# Altium PCB DSS0012A.PcbDoc
Units mm, origin at the board's own origin, x right, y up, seen from the top; angles counter-clockwise.
Board outline 10.92 x 16.13 mm, 2 copper layers (Top Layer, Bottom Layer); 3 components, 13 nets, 25 pads, 0 vias.
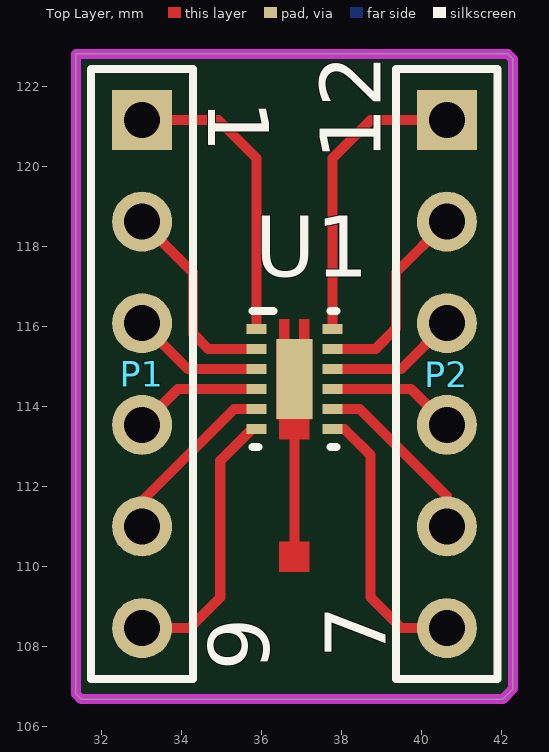
[diagram p0: Top Layer view]
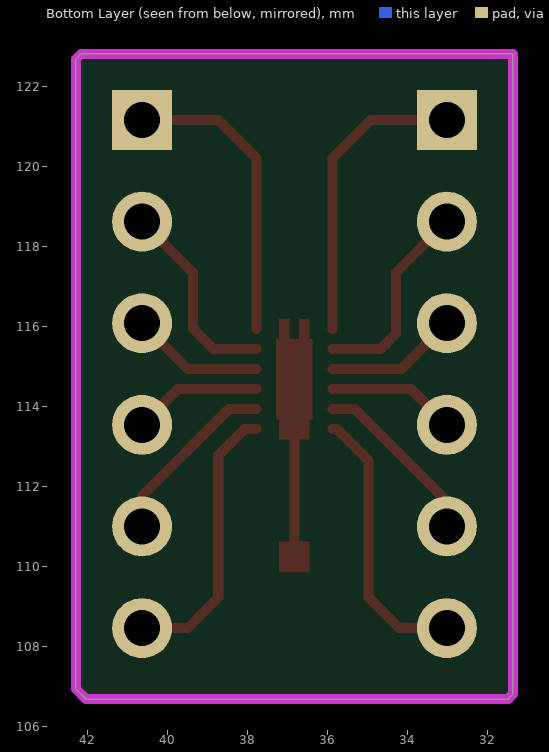
[diagram p1: Bottom Layer view, seen from below]

## Layer stack, top to bottom
Top Solder: solder mask 0.0102, Solder Resist, Dk 3.5
Top Layer: signal copper 0.0356
Dielectric 1: dielectric 0.32, FR-4, Dk 4.8
Bottom Layer: signal copper 0.0356
Bottom Solder: solder mask 0.0102, Solder Resist, Dk 3.5

## Board outline
31.496,106.68 31.369,106.807 31.369,122.809 42.164,122.809 42.291,122.682 42.291,106.934 42.037,106.68

## Design rules (kind name [scope] priority, off if disabled: settings)
Clearance [All] p1 off: gap=0.254 ignorepadtopadclearanceinfootprint=FALSE except(0: Arc-Hole Track-Hole SMDPad-Hole THPad-Hole Via-Hole Fill-Hole Poly-Hole Region-Hole Text-Hole)
ComponentClearance [All] p1 off: gap=0.254 collisioncheckmode=3 verticalgap=0.254 showdistances=FALSE
PolygonConnect [All] p1: connectstyle=Relief reliefconductorwidth=0.254 reliefentries=4 polygonreliefangle="90 Angle" airgapwidth=0.254
RoutingVias [All] p1: holewidth=0.711 width=1.27 viastyle="Through Hole" minholewidth=0.711 minwidth=1.27 maxholewidth=0.711 maxwidth=1.27
SolderMaskExpansion [All] p1: expansion=0.102
Width [All] p1: maxlimit=0.254 minlimit=0.254 preferedwidth=0.254
29 further rules are at their usual default settings.

## Components (designator, comment, footprint, x,y, rotation, side; value= is the part's Value field where it differs from the comment)
P1 "" HDR1X6 33.02,121.158 r270 top
P2 "" HDR1X6 40.64,121.158 r270 top
U1 "" DSS0012A 36.83,114.681 r0 top

## Footprints (in the part's own frame and the unit in brackets; to place one, negate y for a bottom-side part, rotate by r counter-clockwise, add the part's x,y. Pads: shape width x height; smd on the part's side, far side on the other; paste and mask are expansions set on the pad)
DSS0012A [mm]
  rect 0.5x0.25 smd paste+0 mask+0.051: 1(-0.95,1.25) 2(-0.95,0.75) 3(-0.95,0.25) 4(-0.95,-0.25) 5(-0.95,-0.75) 6(-0.95,-1.25) 7(0.95,-1.25) 8(0.95,-0.75) 9(0.95,-0.25) 10(0.95,0.25) 11(0.95,0.75) 12(0.95,1.25)
  rect 0.9x2 smd paste-0.45 mask+0.051: 13(0,0)
  Top Layer region: -0.125,-1.5 -0.375,-1.5 -0.375,-1 -0.45,-1 -0.45,1 -0.375,1 -0.375,1.5 -0.125,1.5 -0.125,1 0.125,1 0.125,1.5 0.375,1.5 0.375,1 0.45,1 0.45,-1 0.375,-1 0.375,-1.5 0.125,-1.5 0.125,-1 -0.125,-1
  silkscreen extent -1.05,-1.7 1.05,1.7
HDR1X6 [mm] "Connector; Header; 6 Position"
  rect 1.5x1.5 hole 0.9: 1(0,0)
  round 1.5 hole 0.9: 2(2.54,0) 3(5.08,0) 4(7.62,0) 5(10.16,0) 6(12.7,0)
  silkscreen extent -1.27,-1.27 13.97,1.27

## Nets (pads, with @x,y where several pads share a name; then routed paths per layer and width w, separated by ;. In a path a pad name is that pad's centre, name@x,y a point inside that pad or via, vN(x,y) a via of type N, cw(c..) or ccw(c..) an arc to the next point about the centre after c; other vN are vias at no path point)
U1-1: P1.1 U1.1 | length 7.5
  Top Layer w0.254: P1.1 34.925,121.158 35.88,120.203 U1.1
U1-2: P1.2 U1.2 | length 5.1
  Top Layer w0.254: P1.2 34.29,117.348 34.29,115.824 34.683,115.431 U1.2
U1-3: P1.3 U1.3 | length 3.3
  Top Layer w0.254: P1.3 34.167,114.931 U1.3
U1-4: P1.4 U1.4 | length 3.2
  Top Layer w0.254: P1.4 33.913,114.431 U1.4
U1-5: P1.5 U1.5 | length 4.4
  Top Layer w0.254: P1.5 33.02,111.633 35.318,113.931 U1.5
U1-6: P1.6 U1.6 | length 6.9
  Top Layer w0.254: P1.6 34.214,108.458 34.976,109.22 34.976,112.644 35.763,113.431 U1.6
U1-7: P2.6 U1.7 | length 7
  Top Layer w0.254: U1.7 38.08,113.431 38.735,112.776 38.735,109.22 39.497,108.458 P2.6
U1-8: P2.5 U1.8 | length 4.5
  Top Layer w0.254: U1.8 38.469,113.931 40.64,111.76 P2.5
U1-9: P2.4 U1.9 | length 3.2
  Top Layer w0.254: U1.9 39.747,114.431 P2.4
U1-10: P2.3 U1.10 | length 3.3
  Top Layer w0.254: U1.10 39.493,114.931 P2.3
U1-11: P2.2 U1.11 | length 5
  Top Layer w0.254: U1.11 38.85,115.431 39.37,115.951 39.37,117.348 P2.2
U1-12: P2.1 U1.12 | length 7.5
  Top Layer w0.254: U1.12 37.78,120.203 38.735,121.158 P2.1
U1-PAD: U1.13 | length 4.4
  Top Layer w0.254: 36.83,110.236 U1.13

## Keep-outs
Keep-Out Layer:
  the board outline again, w0.254

## Other copper
Top Layer:
  rectangle net U1-PAD: 36.449,109.855 37.211,110.617

## Silkscreen, mask and mechanical layers (free items; w line width, h text height)
Top Overlay:
  text "1" at 34.671,121.666 h1.52 r270
  text "12" at 38.989,120.142 h1.52 r90
  text "6" at 34.671,108.712 h1.52 r270
  text "7" at 39.116,107.696 h1.52 r90
Top Paste:
  rectangle: 36.576,109.982 37.084,110.49
Top Solder:
  rectangle: 35.941,109.601 37.719,110.871